# EAGLE board miniprinter z motor mount (EAGLE 9.4.2)
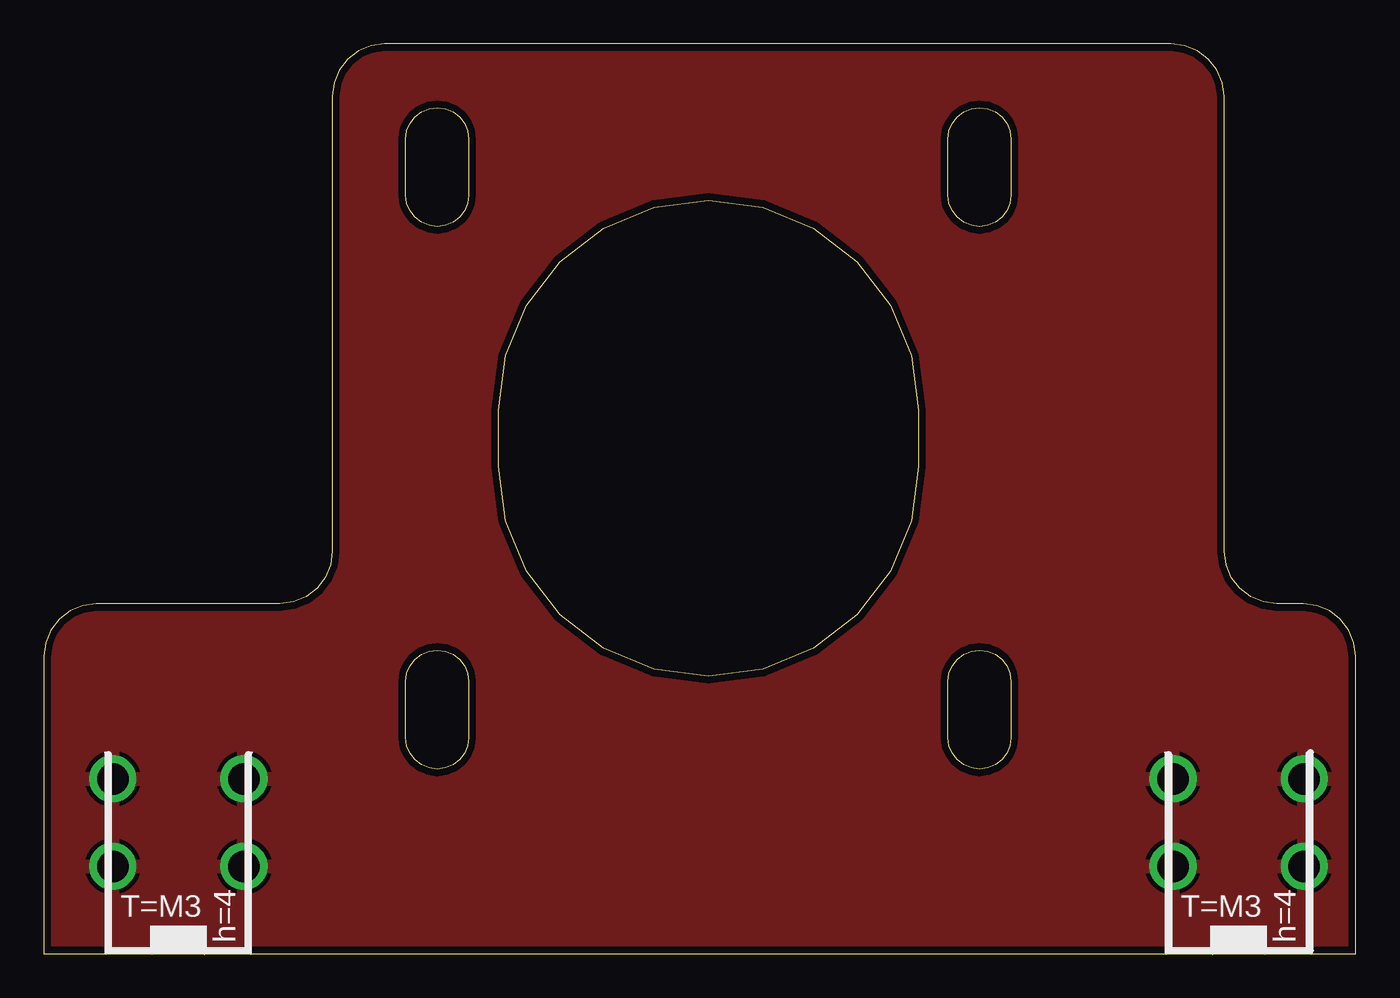
[diagram p0: board, top side]
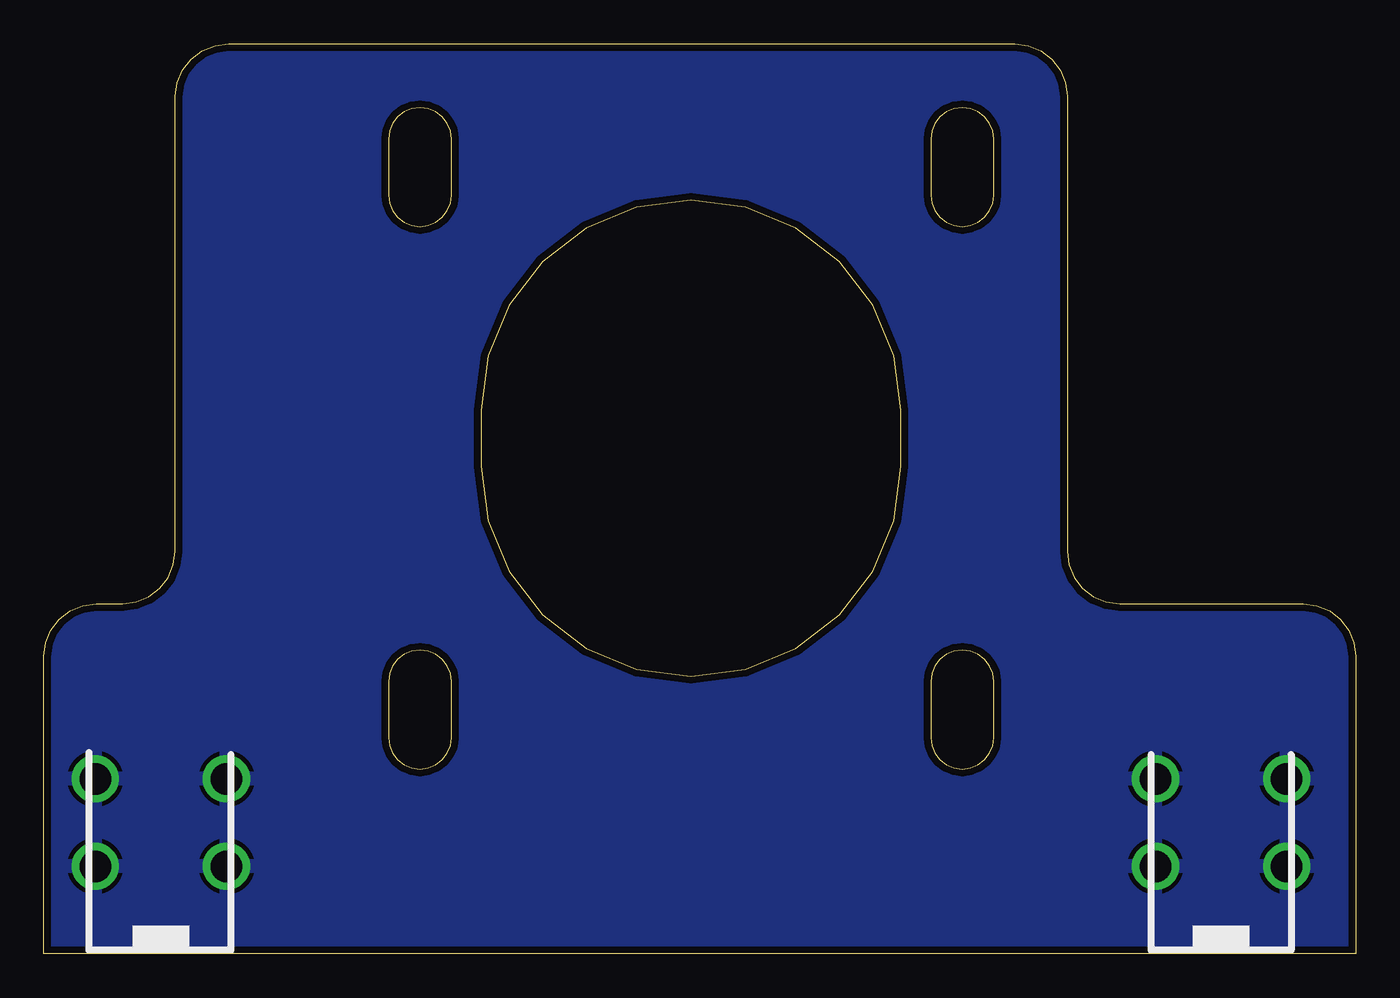
[diagram p1: board, bottom side, seen from below]

Size 75 x 52 mm. Coordinates in mm from the lower left corner, seen from the top.
Outline: 67.6,22.22 67.5,23 67.5,49 67.38,49.78 67.06,50.51 66.57,51.12 65.94,51.6 65.21,51.9 64.43,52 19.5,52 18.72,51.9 18,51.6 17.37,51.12 16.9,50.5 16.6,49.78 16.5,49 16.5,23 16.39,22.22 16.09,21.5 15.62,20.88 15,20.4 14.27,20.1 13.5,20 3,20 2.22,19.9 1.5,19.6 0.88,19.12 0.4,18.5 0.1,17.78 0,17 0,0 75,0 75,17 74.9,17.78 74.6,18.5 74.12,19.12 73.5,19.6 72.78,19.9 72,20 70.5,20 69.72,20.1 69,20.4 68.37,20.88 67.9,21.5 67.6,22.22
Outline: 26.4,24.75 26,27.85 26,31.05 26.4,34.16 27.6,37.05 29.51,39.54 32,41.45 34.89,42.65 38,43.05 41.1,42.65 44,41.45 46.48,39.54 48.39,37.05 49.59,34.16 50,31.05 50,27.85 49.59,24.75 48.39,21.85 46.48,19.37 44,17.46 41.1,16.26 38,15.85 34.89,16.26 32,17.46 29.51,19.37 27.6,21.85 26.4,24.75
Outline: 51.76,11.89 51.69,12.35 51.69,15.55 51.76,16.02 51.94,16.45 52.22,16.83 52.59,17.11 53.03,17.29 53.5,17.35 53.96,17.29 54.4,17.11 54.77,16.83 55.05,16.45 55.23,16.02 55.29,15.55 55.29,12.35 55.23,11.89 55.05,11.45 54.77,11.08 54.4,10.79 53.96,10.62 53.5,10.55 53.03,10.62 52.59,10.79 52.22,11.08 51.94,11.45 51.76,11.89
Outline: 51.76,42.89 51.69,43.35 51.69,46.55 51.76,47.02 51.94,47.45 52.22,47.83 52.59,48.11 53.03,48.29 53.5,48.35 53.96,48.29 54.4,48.11 54.77,47.83 55.05,47.45 55.23,47.02 55.29,46.55 55.29,43.35 55.23,42.89 55.05,42.45 54.77,42.08 54.4,41.8 53.96,41.62 53.5,41.55 53.03,41.62 52.59,41.8 52.22,42.08 51.94,42.45 51.76,42.89
Outline: 20.76,42.89 20.69,43.35 20.69,46.55 20.76,47.02 20.94,47.45 21.22,47.83 21.59,48.11 22.03,48.29 22.5,48.35 22.96,48.29 23.4,48.11 23.77,47.83 24.05,47.45 24.23,47.02 24.29,46.55 24.29,43.35 24.23,42.89 24.05,42.45 23.77,42.08 23.4,41.8 22.96,41.62 22.5,41.55 22.03,41.62 21.59,41.8 21.22,42.08 20.94,42.45 20.76,42.89
Outline: 20.76,11.89 20.69,12.35 20.69,15.55 20.76,16.02 20.94,16.45 21.22,16.83 21.59,17.11 22.03,17.29 22.5,17.35 22.96,17.29 23.4,17.11 23.77,16.83 24.05,16.45 24.23,16.02 24.29,15.55 24.29,12.35 24.23,11.89 24.05,11.45 23.77,11.08 23.4,10.79 22.96,10.62 22.5,10.55 22.03,10.62 21.59,10.79 21.22,11.08 20.94,11.45 20.76,11.89
Copper layers (1*16): Top 0.035mm / dielectric 1.5mm / Bottom 0.035mm
Design rules "default *": minimum track width 6mil, minimum drill 0.35mm, track to track 6mil, track to pad 6mil, pad to pad 6mil, via to via 6mil, smd to smd 6mil, copper to edge 10mil, drill to drill 6mil, minimum pad ring 10mil, minimum via ring 8mil, stop-mask expansion 4mil, vias tented up to drill 0mil, thermal gap 10mil
Net classes: 0 default: width 0.203 mm, clearance 0.152 mm

## Footprints (pad centres in the part's own frame; a part is rotated, then mirrored left to right if it is on the bottom)
PCB2-M3 = drill 1.8: P$1 -3.75,-5; P$2 3.75,-5; P$3 3.75,-10; P$4 -3.75,-10

## Placement (x,y rotation side)
CON1  PCB-2M3  [PCB2-M3]  7.7,0 180 top
CON7  PCB-2M3  [PCB2-M3]  68.3,0 180 top

## Library data of the parts
CON1 CON7 = Screw Terminals

## Nets
ZMOTORGND: CON1.P$1 CON1.P$2 CON1.P$3 CON1.P$4 CON7.P$1 CON7.P$2 CON7.P$3 CON7.P$4

## Tracks (layer width: path | path; a pad name or v marks a point on that pad's centre or on a via)
ZMOTORGND
  pour Top (isolate 0.406): 65.6,51.9 18.2,51.9 16.4,50.1 16.4,22.6 13.9,20.1 1.6,20.1 0.1,18.6 0.1,0.3 0.2,0.2 74.9,0.2 74.9,17.9 72.5,20.3 69.6,20.3 67.5,22.4 67.5,50
  pour Bottom (isolate 0.406): 65.6,52.2 18.2,52.2 16.4,50.4 16.4,22.9 13.9,20.4 1.6,20.4 0.1,18.9 0.1,0.6 0.2,0.5 74.9,0.5 74.9,18.2 72.5,20.6 69.6,20.6 67.5,22.7 67.5,50.3